# Altium PCB Panel for LED_MAT-20180829-1100.PcbDoc
Units mm, origin at the board's own origin, x right, y up, seen from the top; angles counter-clockwise.
Board outline 141.6 x 149.48 mm, 2 copper layers (Top Layer, Bottom Layer); 4 components, 0 nets, 4 pads, 0 vias.
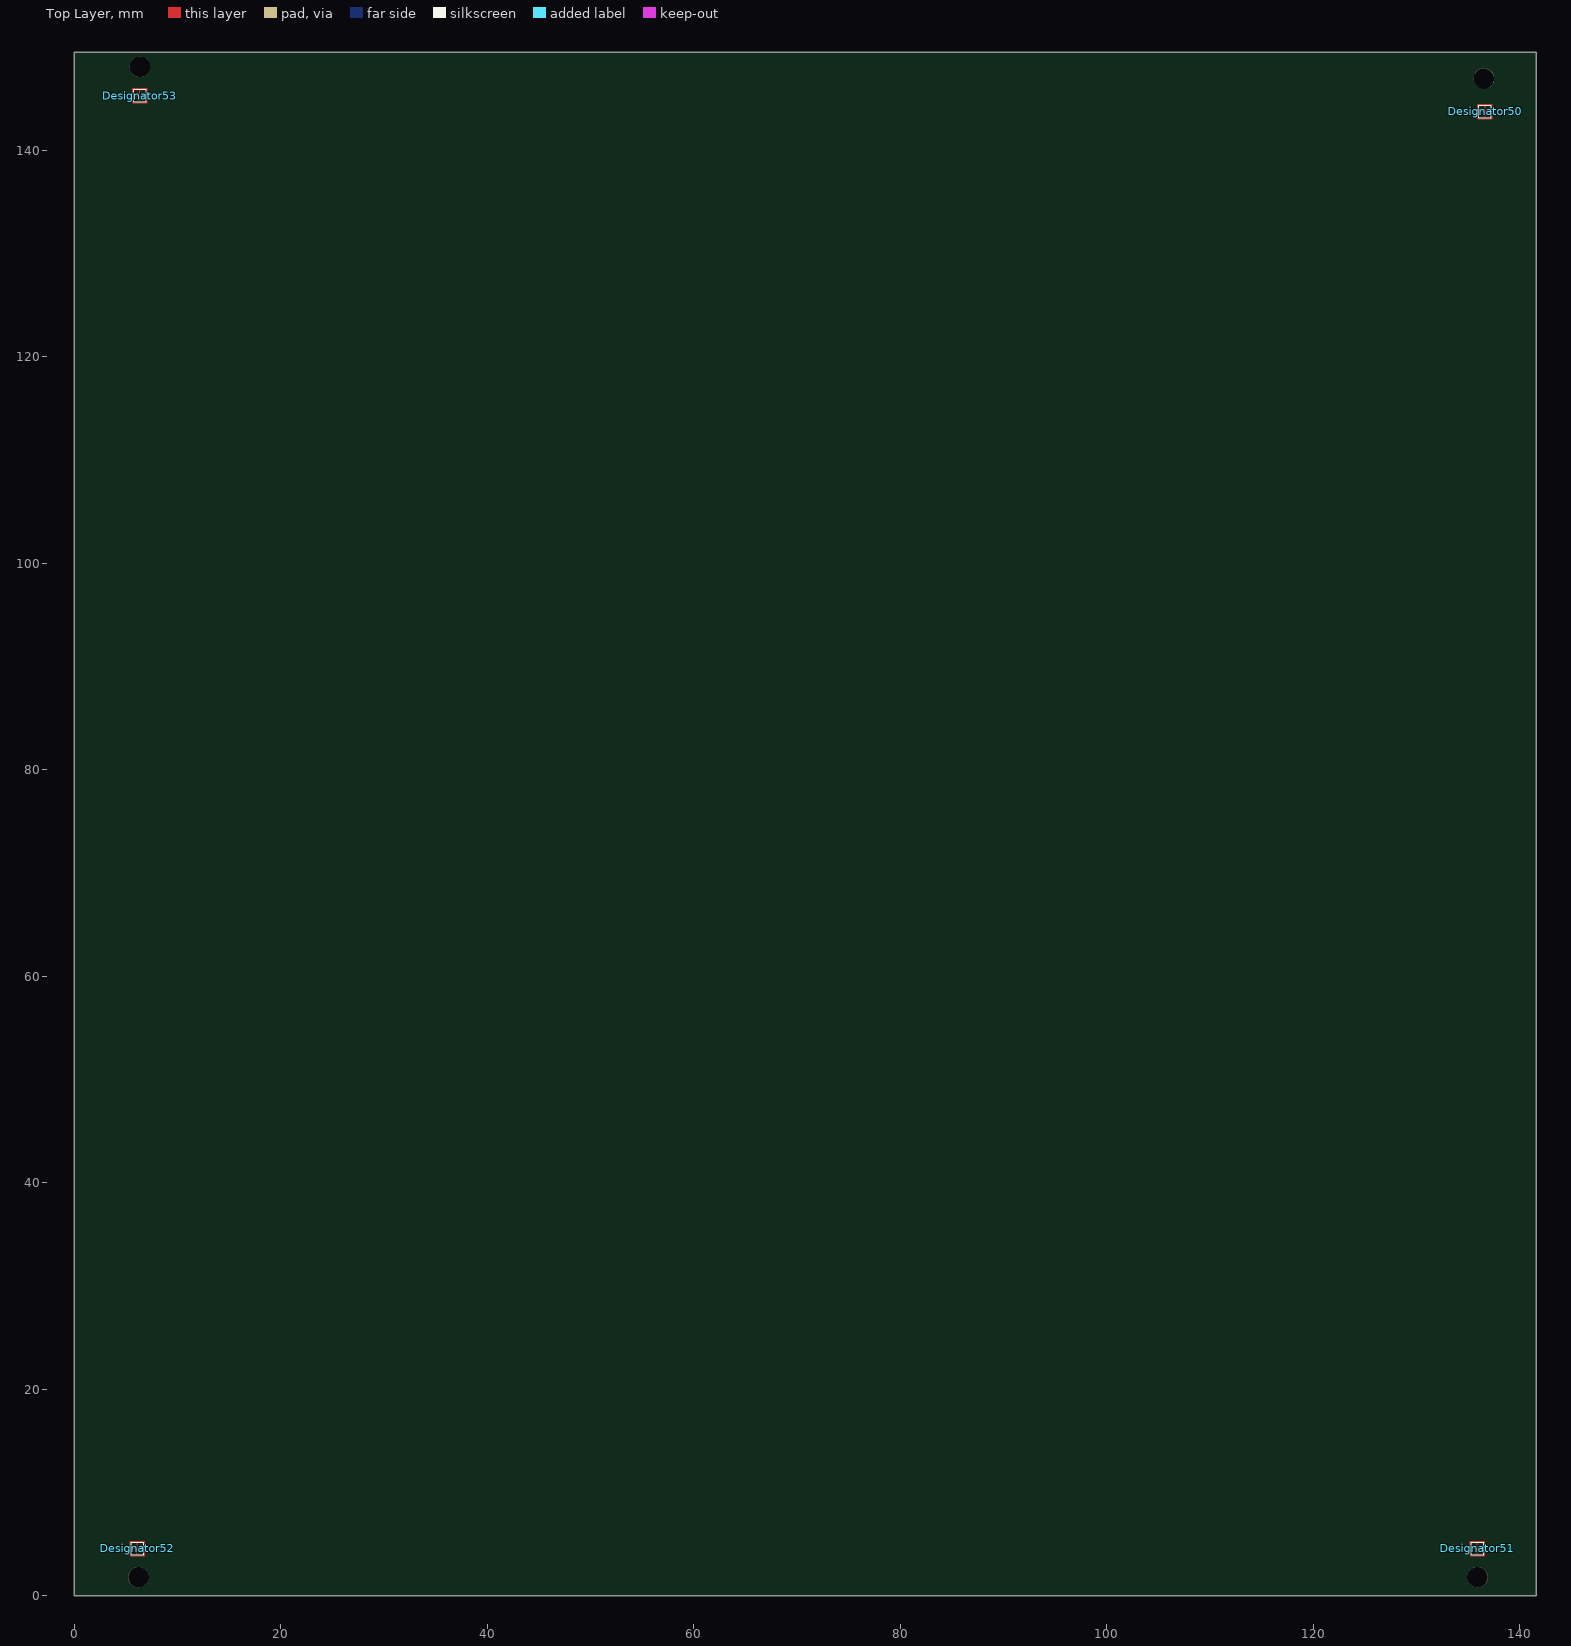
[diagram p0: Top Layer view]
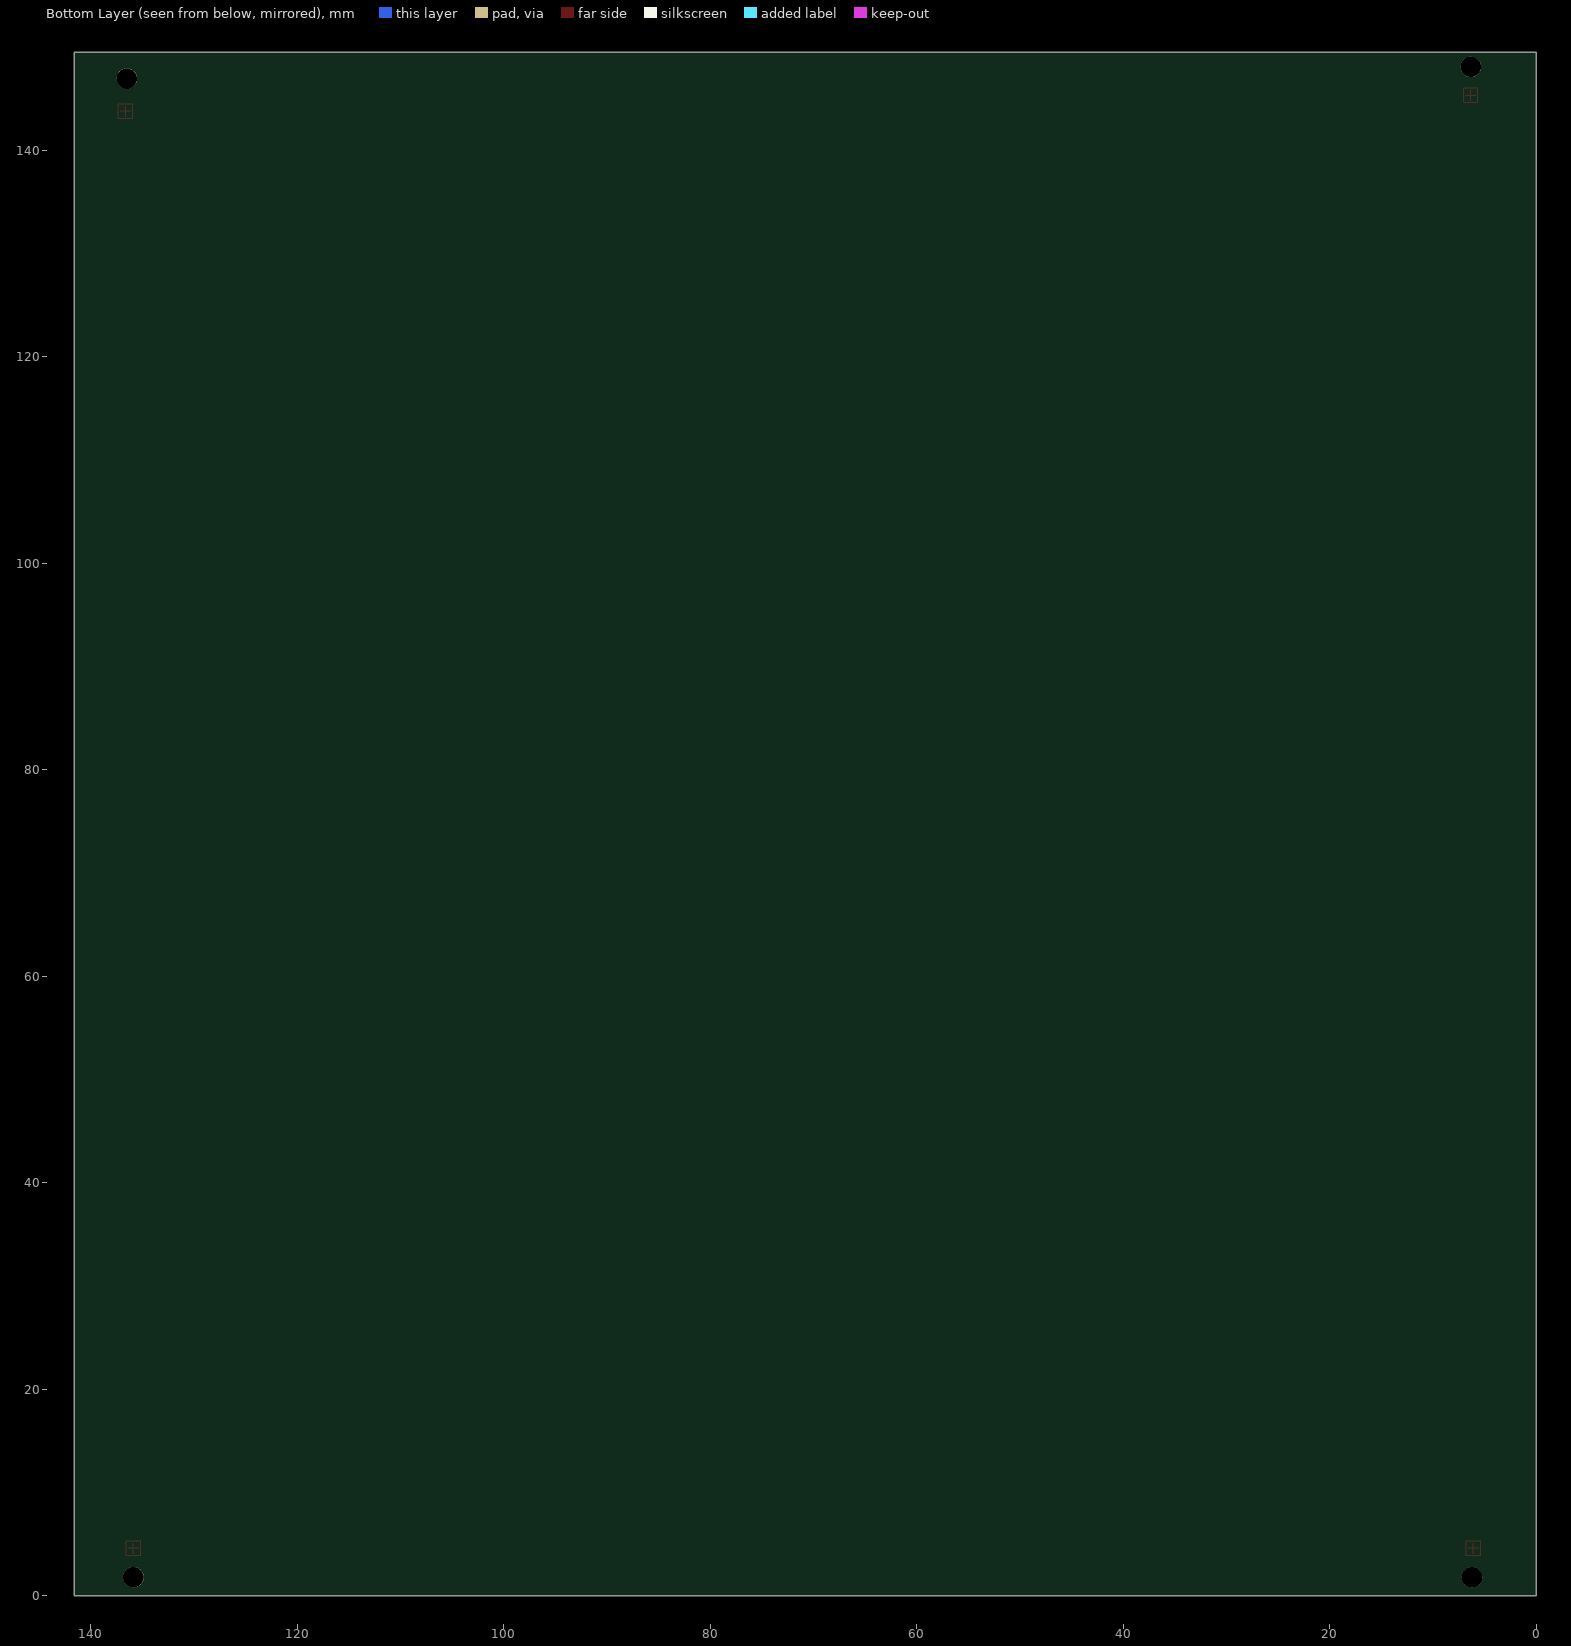
[diagram p1: Bottom Layer view, seen from below]

## Layer stack, top to bottom
Top Solder: solder mask 0.0102, Solder Resist, Dk 3.5
Top Layer: signal copper 0.0356
Dielectric 1: dielectric 0.32, FR-4, Dk 4.8
Bottom Layer: signal copper 0.0356
Bottom Solder: solder mask 0.0102, Solder Resist, Dk 3.5

## Board outline
0,0 0,149.479 141.605,149.479 141.605,0

## Design rules (kind name [scope] priority, off if disabled: settings)
Clearance [All] p1: gap=0.254 ignorepadtopadclearanceinfootprint=FALSE except(0: Arc-Hole Track-Hole SMDPad-Hole THPad-Hole Via-Hole Fill-Hole Poly-Hole Region-Hole Text-Hole)
PolygonConnect [All] p1: connectstyle=Relief reliefconductorwidth=0.254 reliefentries=4 polygonreliefangle="90 Angle" airgapwidth=0.254
RoutingVias [All] p1: holewidth=0.711 width=1.27 viastyle="Through Hole" minholewidth=0.711 minwidth=1.27 maxholewidth=0.711 maxwidth=1.27
SolderMaskExpansion [All] p1: expansion=0.102
Width [All] p1: maxlimit=0.254 minlimit=0.254 preferedwidth=0.254
30 further rules are at their usual default settings.

## Components (designator, comment, footprint, x,y, rotation, side; value= is the part's Value field where it differs from the comment)
Designator50 "Comment" Pass-marke 136.652,143.764 r0 top
Designator51 "Comment" Pass-marke 135.89,4.572 r0 top
Designator52 "Comment" Pass-marke 6.096,4.572 r0 top
Designator53 "Comment" Pass-marke 6.35,145.288 r0 top

## Footprints (in the part's own frame and the unit in brackets; to place one, negate y for a bottom-side part, rotate by r counter-clockwise, add the part's x,y. Pads: shape width x height; smd on the part's side, far side on the other; paste and mask are expansions set on the pad)
Pass-marke [mm]
  Top Layer lines w0.1: -0.5,0 0,0 ; 0,-0.5 0,0 ; 0,0.5 0,0 ; 0.5,0 0,0 ; -0.7,-0.7 0.7,-0.7 0.7,0.7 -0.7,0.7 -0.7,-0.7
  silkscreen extent -0.6,-0.6 0.6,0.6

## Free pads (board coordinates)
  round 2 hole 2 unplated: 0(6.223,1.778) 0(6.35,148.082) 0(135.89,1.778) 0(136.525,146.939)

## Nets (pads, with @x,y where several pads share a name; then routed paths per layer and width w, separated by ;. In a path a pad name is that pad's centre, name@x,y a point inside that pad or via, vN(x,y) a via of type N, cw(c..) or ccw(c..) an arc to the next point about the centre after c; other vN are vias at no path point)

## Silkscreen, mask and mechanical layers (free items; w line width, h text height)
Mechanical 1:
  lines w0.254: 0,0 141.605,0 141.605,149.479 7.366,149.479 0,149.479 0,0

## Panel: embedded boards
"LED_MAT.PcbDoc" at 7.239,-0.254, 2 rows x 1 columns, spacing 80 x 38.1, rotation 0